# EAGLE board C335_project (EAGLE 6.1)
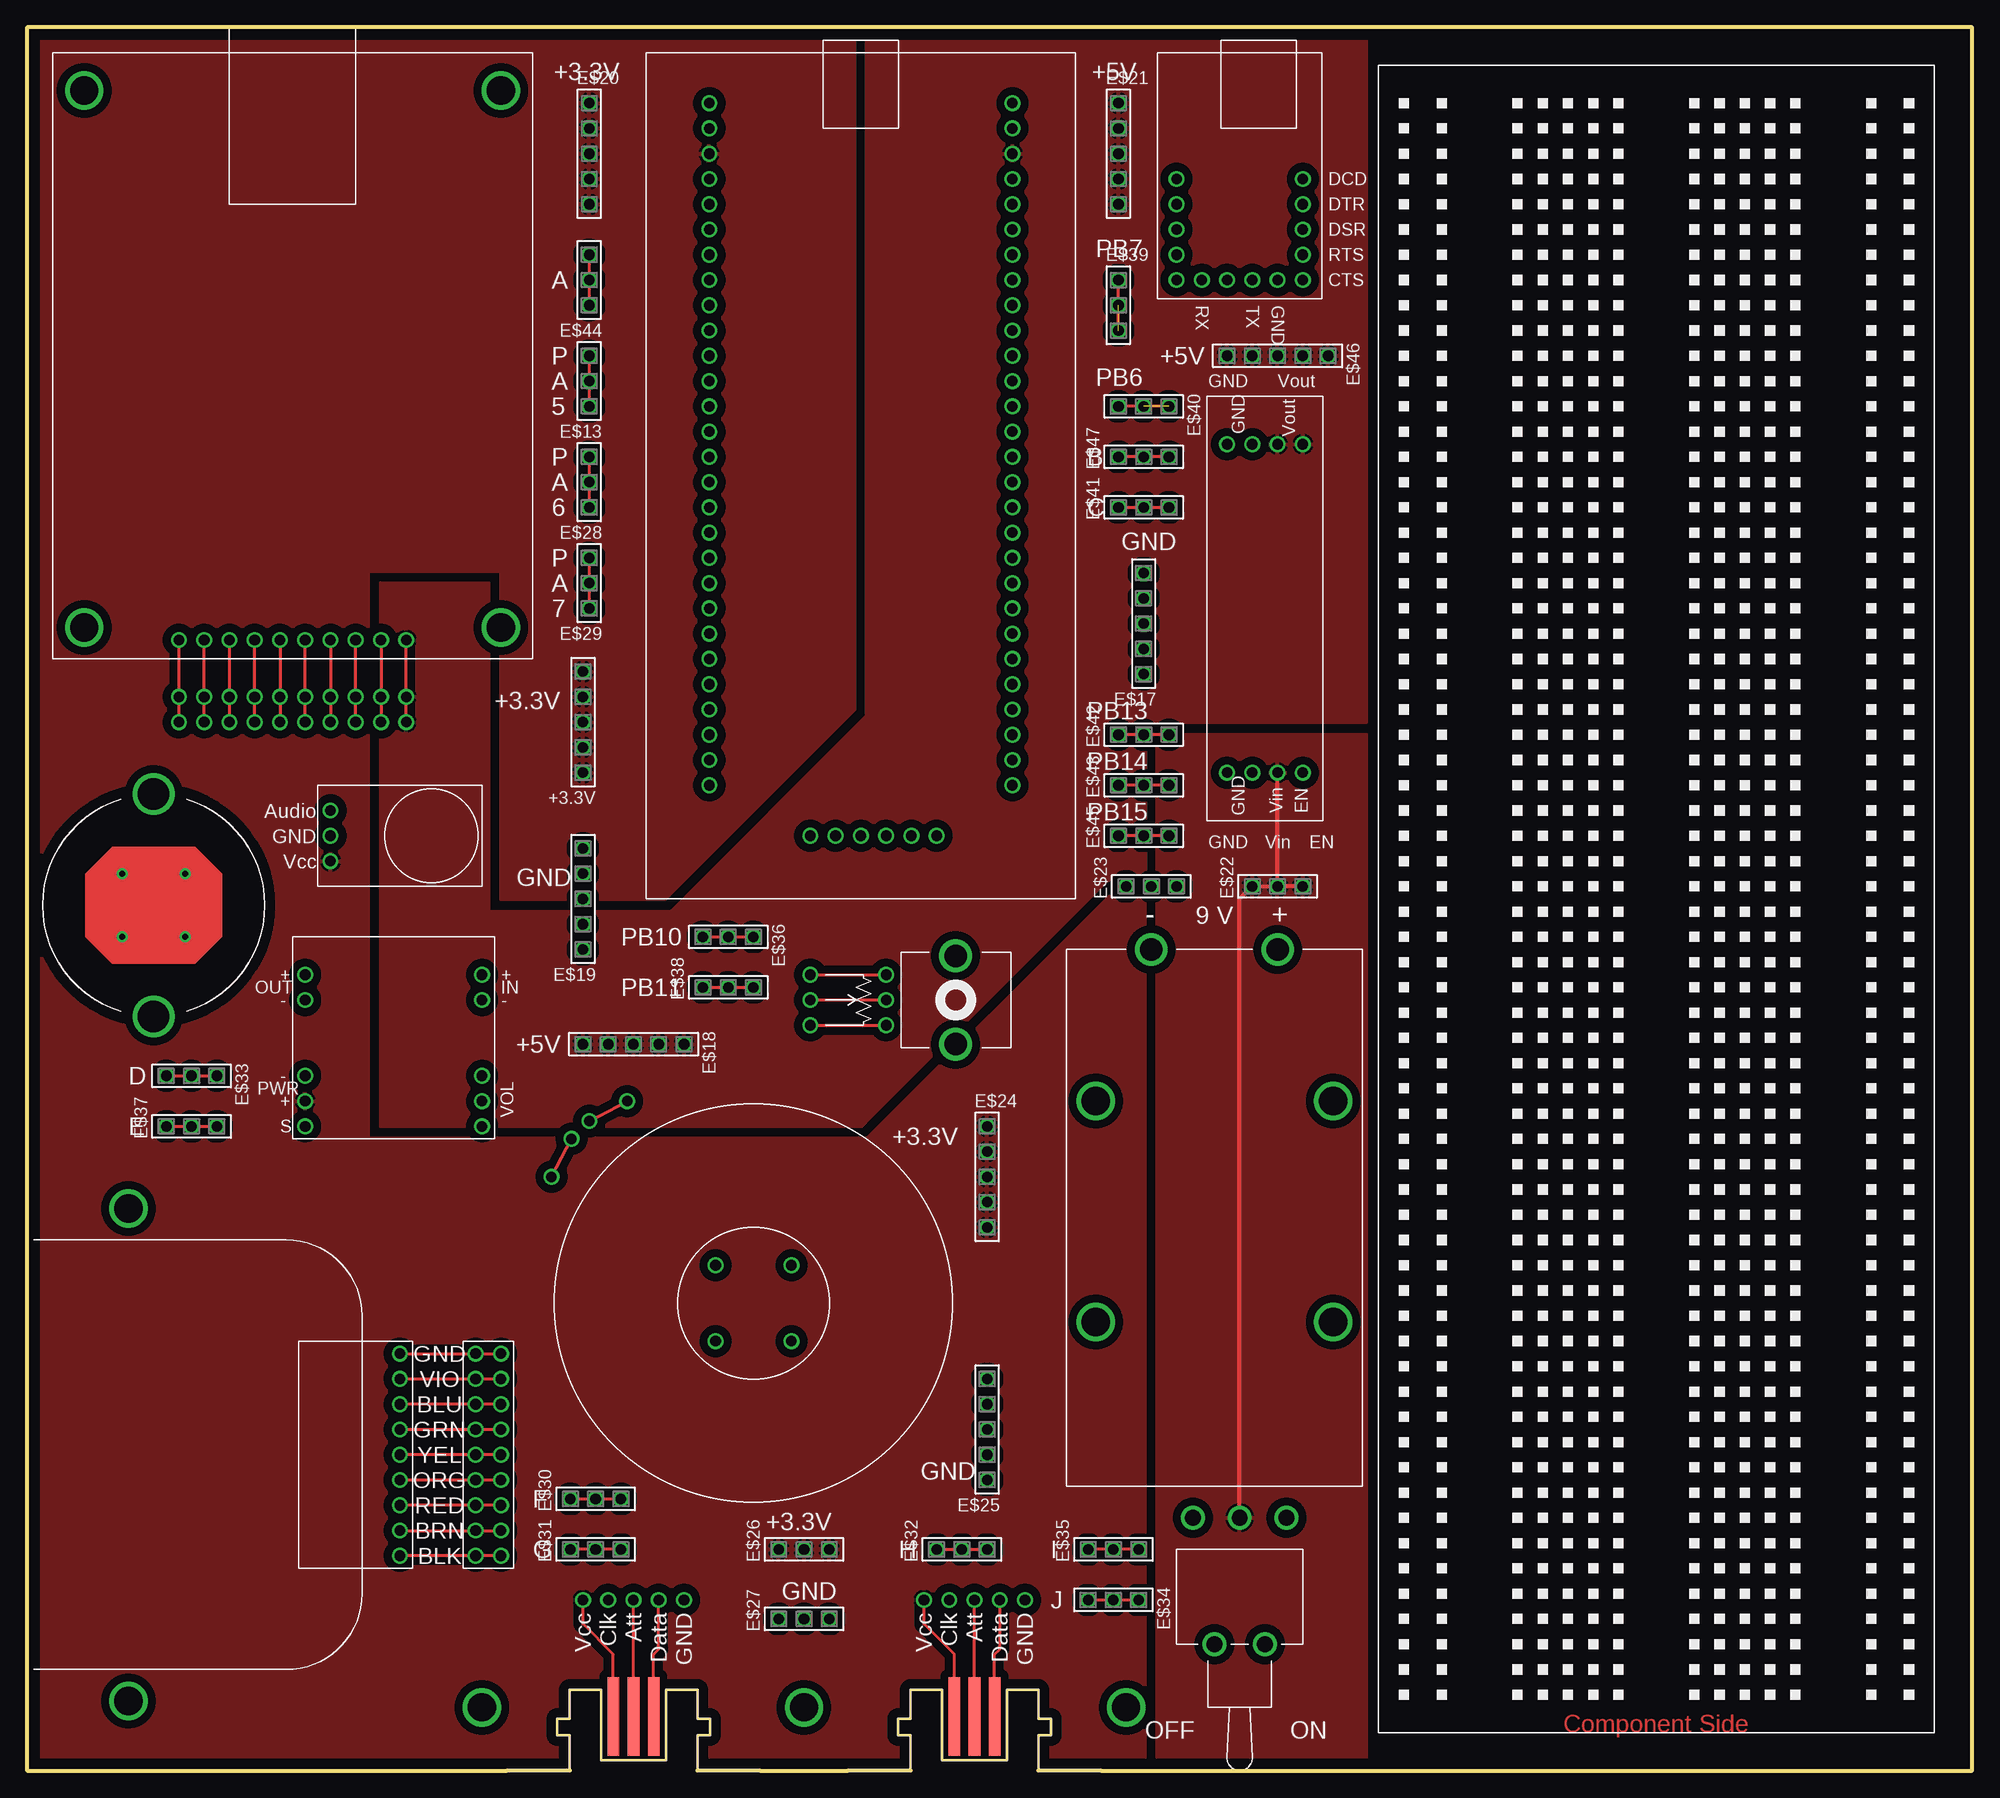
[diagram p0: board, top side]
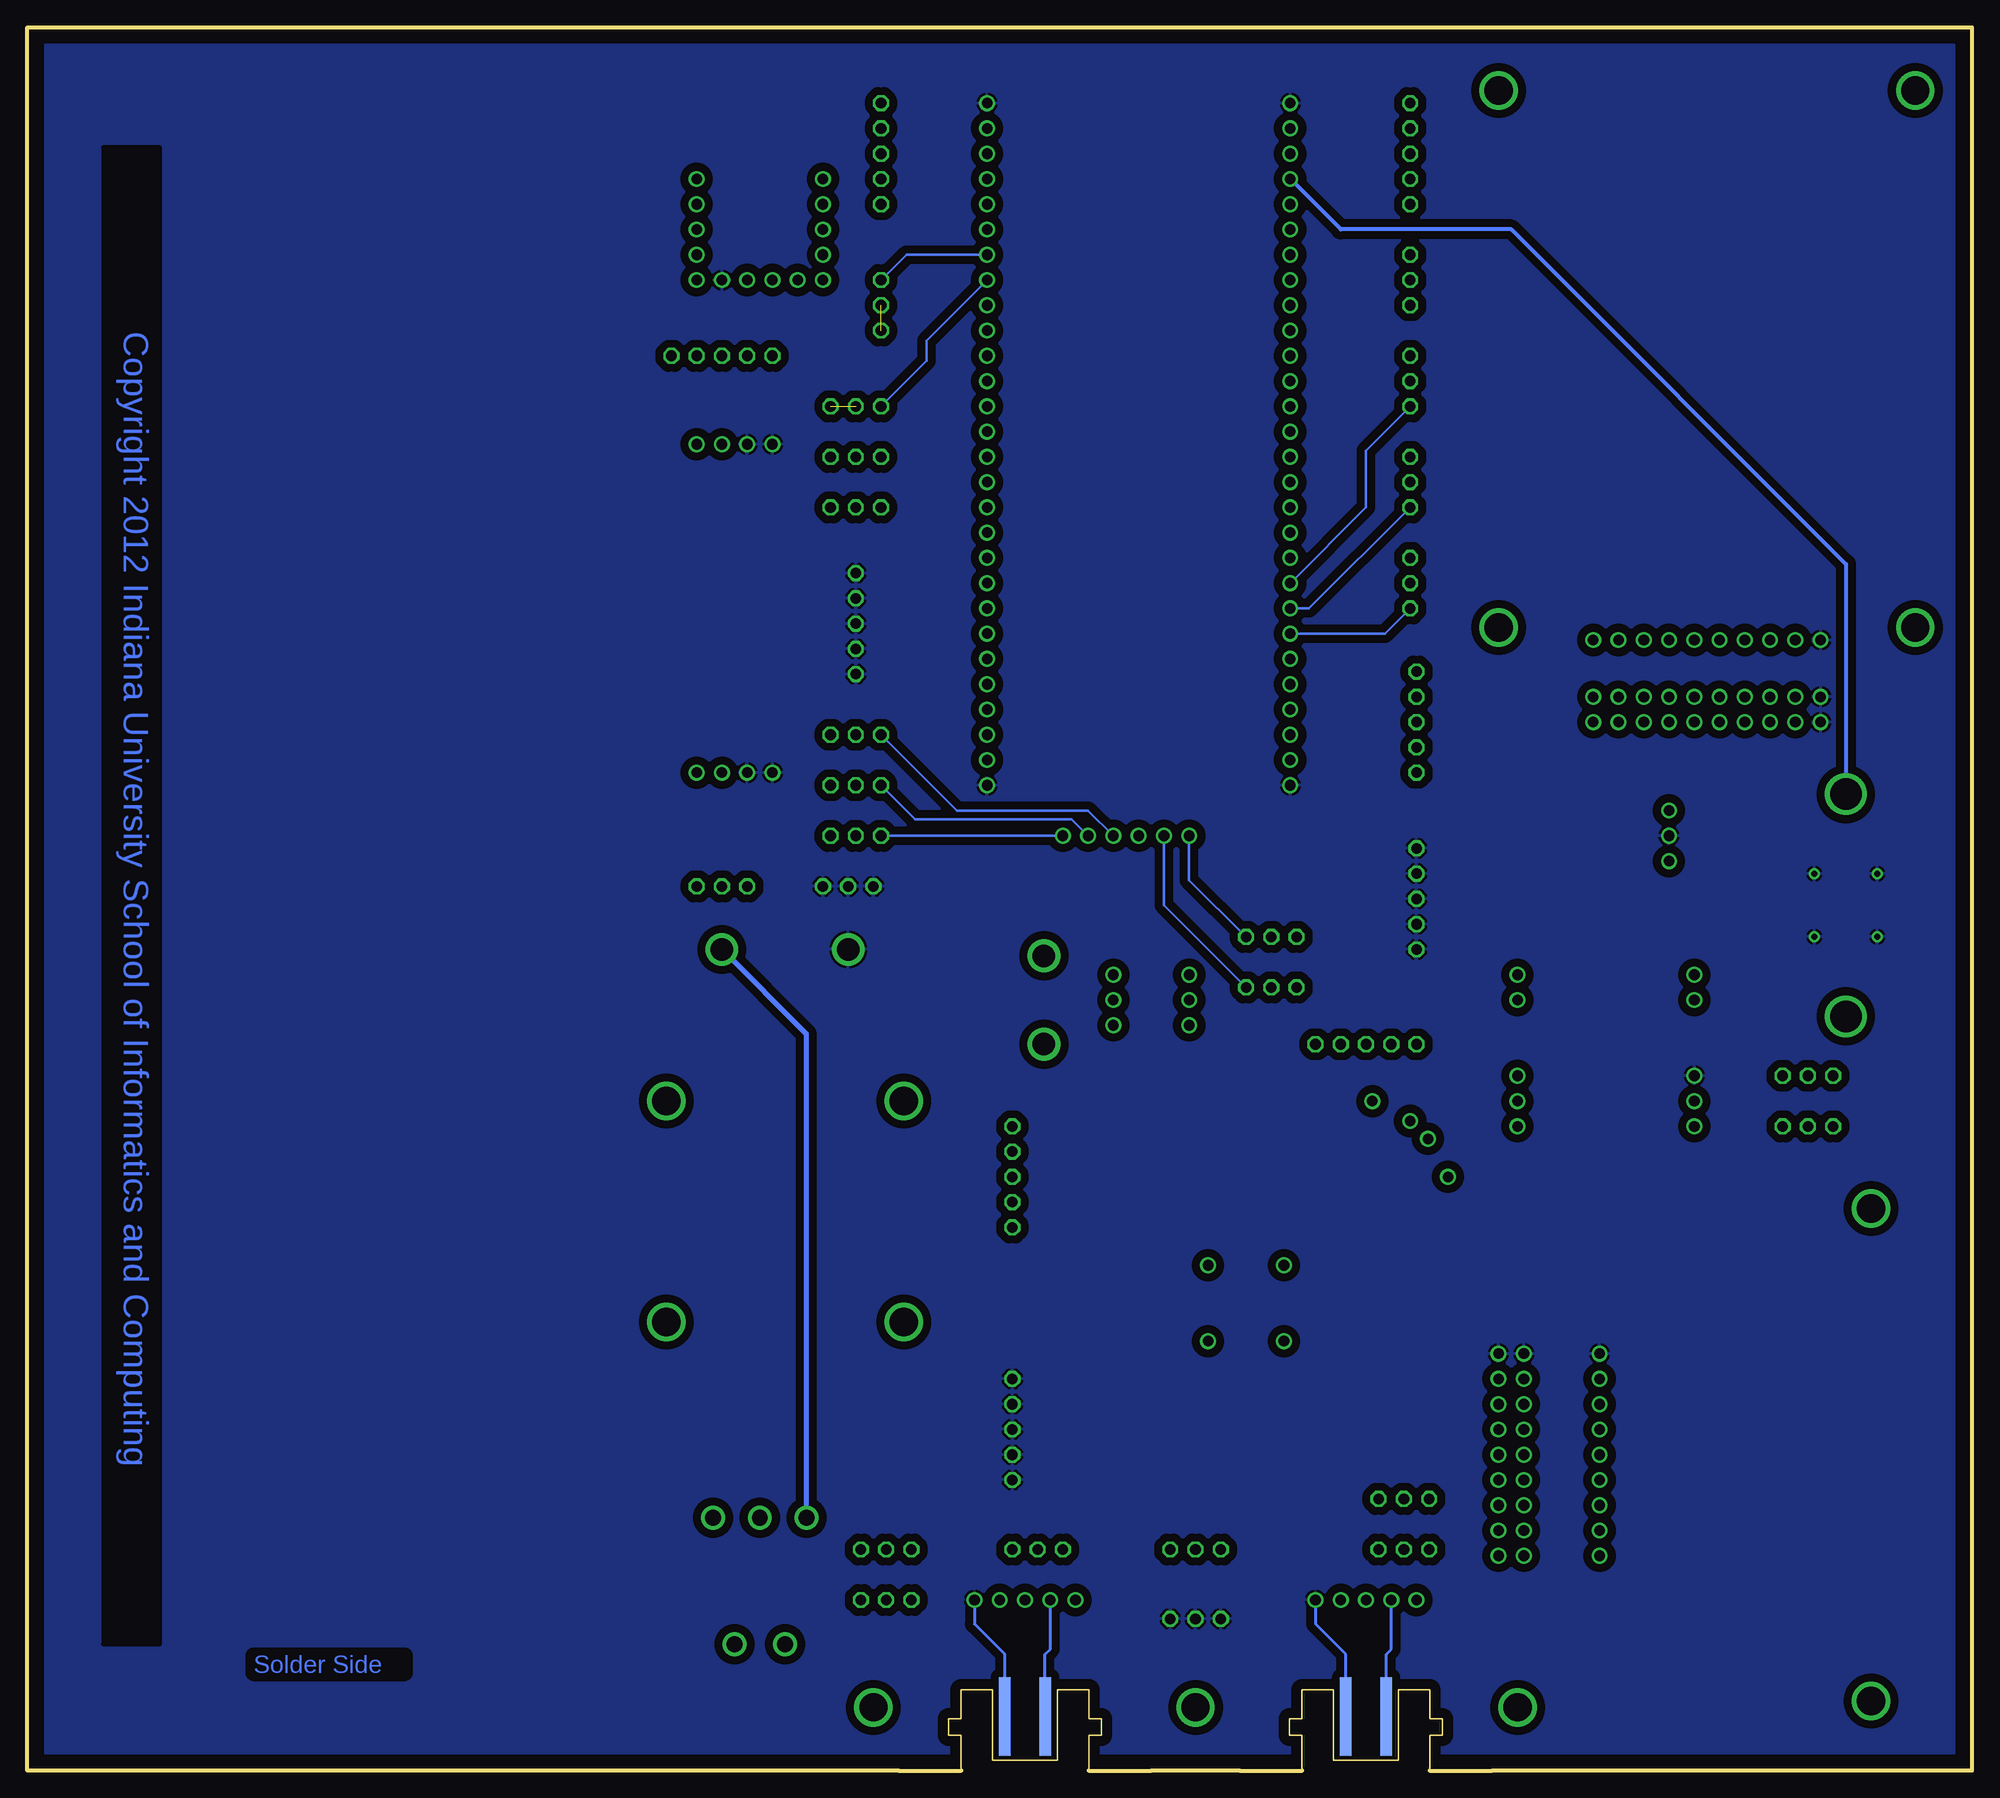
[diagram p1: board, bottom side, seen from below]

Size 195.58 x 175.26 mm. Coordinates in mm from the lower left corner, seen from the top.
Outline: 48.26,0 0,0 0,175.26 195.58,175.26 195.58,0 107.95,0
Outline: 73.66,0 82.55,0
Copper layers (1*16): Top 0.035mm / dielectric 1.5mm / Bottom 0.035mm
Design rules: minimum track width 10mil, minimum drill 20mil, track to track 8mil, track to pad 8mil, pad to pad 8mil, via to via 8mil, smd to smd 8mil, copper to edge 40mil, drill to drill 8mil, minimum pad ring 10mil, minimum via ring 8mil, stop-mask expansion 4mil, vias tented up to drill 0mil, thermal gap 10mil

## Footprints (pad centres in the part's own frame; a part is rotated, then mirrored left to right if it is on the bottom)
SSW-105-02-S-S = drill 1.067 pad 1.5 octagon: 1 -5.08,0; 2 -2.54,0; 3 0,0; 4 2.54,0; 5 5.08,0
TFT_LCD = drill 2.845: 1 -20.955,55.88; 2 20.955,55.88; 3 -20.955,1.905; 4 20.955,1.905 | drill 1.067: P$1 -11.43,0.635; P$2 -8.89,0.635; P$3 -6.35,0.635; P$4 -3.81,0.635; P$5 -1.27,0.635; P$6 1.27,0.635; P$7 3.81,0.635; P$8 6.35,0.635; P$9 8.89,0.635; P$10 11.43,0.635; P$11 -11.43,-7.62; P$12 -8.89,-7.62; P$13 -6.35,-7.62; P$14 -3.81,-7.62; P$15 -1.27,-7.62; P$16 1.27,-7.62; P$17 3.81,-7.62; P$18 6.35,-7.62; P$19 8.89,-7.62; P$20 11.43,-7.62; P$21 -11.43,-5.08; P$22 -8.89,-5.08; P$23 -6.35,-5.08; P$24 -3.81,-5.08; P$25 -1.27,-5.08; P$26 1.27,-5.08; P$27 3.81,-5.08; P$28 6.35,-5.08; P$29 8.89,-5.08; P$30 11.43,-5.08
USB_SER = drill 1.067: 1 -6.35,0; 2 -3.81,0; 3 -1.27,0; 4 1.27,0; 5 3.81,0; 6 6.35,0; 7 -6.35,2.54; 8 -6.35,5.08; 9 -6.35,7.62; 10 -6.35,10.16; 11 6.35,2.54; 12 6.35,5.08; 13 6.35,7.62; 14 6.35,10.16
STM32 = drill 1.067: P$1 -15.24,5.08; P$2 -15.24,7.62; P$3 -15.24,10.16; P$4 -15.24,12.7; P$5 -15.24,15.24; P$6 -15.24,17.78; P$7 -15.24,20.32; P$8 -15.24,22.86; P$9 -15.24,25.4; P$10 -15.24,27.94; P$11 -15.24,30.48; P$12 -15.24,33.02; P$13 -15.24,35.56; P$14 -15.24,38.1; P$15 -15.24,40.64; P$16 -15.24,43.18; P$17 -15.24,45.72; P$18 -15.24,48.26; P$19 -15.24,50.8; P$20 -15.24,53.34; P$21 -15.24,55.88; P$22 -15.24,58.42; P$23 -15.24,60.96; P$24 -15.24,63.5; P$25 -15.24,66.04; P$26 -15.24,68.58; P$27 -15.24,71.12; P$28 -15.24,73.66; P$57 -5.08,0; P$58 -2.54,0; P$59 0,0; P$60 2.54,0; P$61 5.08,0; P$62 7.62,0; P$63 15.24,5.08; P$64 15.24,7.62; P$65 15.24,10.16; P$66 15.24,12.7; P$67 15.24,15.24; P$68 15.24,17.78; P$69 15.24,20.32; P$70 15.24,22.86; P$71 15.24,25.4; P$72 15.24,27.94; P$73 15.24,30.48; P$74 15.24,33.02; P$75 15.24,35.56; P$76 15.24,38.1; P$77 15.24,40.64; P$78 15.24,43.18; P$79 15.24,45.72; P$80 15.24,48.26; P$81 15.24,50.8; P$82 15.24,53.34; P$83 15.24,55.88; P$84 15.24,58.42; P$85 15.24,60.96; P$86 15.24,63.5; P$87 15.24,66.04; P$88 15.24,68.58; P$89 15.24,71.12; P$90 15.24,73.66
MIC = drill 1.067: 1 0,0; 2 -2.54,0; 3 2.54,0
NUNCHUK_CONN = drill 1.067: 1 17.145,5.08; 2 17.145,2.54; 3 17.145,-2.54; 15 17.145,0; P$1 17.145,-5.08 | smd 7.925 x 1.168: P$2 5.436,-2.032; P$3 5.436,0; P$4 5.436,2.032 | smd 7.925 x 1.168 bottom: P$5 5.436,2.032; P$7 5.436,-2.032
SALEAE_HDR = drill 1.067: 1 0,-1.27; 2 -2.54,-1.27; 3 -5.08,-1.27; 4 -7.62,-1.27; 5 -10.16,-1.27; 6 2.54,-1.27; 7 5.08,-1.27; 8 7.62,-1.27; 9 10.16,-1.27; 10 0,8.89; 11 -2.54,8.89; 12 -5.08,8.89; 13 -7.62,8.89; 14 -10.16,8.89; 15 2.54,8.89; 16 5.08,8.89; 17 7.62,8.89; 18 10.16,8.89; 21 0,6.35; 22 -2.54,6.35; 23 -5.08,6.35; 24 -7.62,6.35; 25 -10.16,6.35; 26 2.54,6.35; 27 5.08,6.35; 28 7.62,6.35; 29 10.16,6.35 | drill 2.845: 19 -24.765,-28.575; 20 24.765,-28.575
AUDIO_AMP = drill 1.067: 1 1.27,1.27; 2 1.27,3.81; 3 1.27,6.35; 4 1.27,13.97; 5 1.27,16.51; 6 19.05,1.27; 7 19.05,3.81; 8 19.05,6.35; 9 19.05,13.97; 10 19.05,16.51
SPEAKER = drill 1.067: 1 -16.51,18.313; 2 -18.313,16.51; 3 -20.32,12.7; 4 -12.7,20.32; P$1 -3.81,3.81; P$2 -3.81,-3.81; P$3 3.81,-3.81; P$4 3.81,3.81
PWR_REG = drill 1.067: P$1 -16.51,3.81; P$2 -16.51,1.27; P$3 -16.51,-1.27; P$4 -16.51,-3.81; P$5 16.51,3.81; P$6 16.51,1.27; P$7 16.51,-1.27; P$8 16.51,-3.81
BATT_9V = drill 2.261: 1 0,6.35; 2 0,-6.35 | drill 2.845: 3 15.24,11.938; 4 15.24,-11.938; 5 37.465,11.938; 6 37.465,-11.938
SSW-103-02-S-S = drill 1.067 pad 1.5 octagon: 1 -2.54,0; 2 0,0; 3 2.54,0
POT = drill 1.067: 1 0,2.54; 2 0,0; 3 0,-2.54; 6 -7.62,2.54; 7 -7.62,0; 8 -7.62,-2.54 | drill 2.261: 4 6.985,4.445; 5 6.985,-4.445
SW_TOG_HOR_PC = drill 1.6: 1 -2.54,0; 2 2.54,0; 3 0,12.7; 4 -4.699,12.7; 5 4.699,12.7
BATT_CR20 = drill 3.175: 1 -11.176,0; 2 11.176,0 | drill 0.61: 3 -3.175,3.175; 4 3.175,3.175; 5 -3.175,-3.175; 6 3.175,-3.175

## Placement (x,y rotation side)
+3.3V  [SSW-105-02-S-S]  55.88,105.41 90 top
E$1  [TFT_LCD]  26.67,113.03 0 top
E$2  [USB_SER]  121.92,149.86 0 top
E$3  [STM32]  83.82,93.98 0 top
E$4  [PROTOBRD]  163.83,7.62 0 top
E$5  [MIC]  30.48,93.98 270 top
E$6  [NUNCHUK_CONN]  60.96,0 90 top
E$7  [NUNCHUK_CONN]  95.25,0 90 top
E$8  [SALEAE_HDR]  38.74,31.75 270 top
E$9  [AUDIO_AMP]  26.67,63.5 0 top
E$10  [SPEAKER]  73.03,46.99 0 top
E$11  [PWR_REG]  124.46,116.84 90 top
E$12  [BATT_9V]  119.38,82.55 270 top
E$13  [SSW-103-02-S-S]  56.52,139.7 90 top
E$14  [POT]  86.36,77.47 0 top
E$15  [SW_TOG_HOR_PC]  121.92,12.7 0 top
E$16  [BATT_CR20]  12.7,87 90 top
E$17  [SSW-105-02-S-S]  112.27,115.32 90 top
E$18  [SSW-105-02-S-S]  60.96,73.03 180 top
E$19  [SSW-105-02-S-S]  55.88,87.63 90 top
E$20  [SSW-105-02-S-S]  56.52,162.56 270 top
E$21  [SSW-105-02-S-S]  109.73,162.56 270 top
E$22  [SSW-103-02-S-S]  125.73,88.9 0 top
E$23  [SSW-103-02-S-S]  113.03,88.9 0 top
E$24  [SSW-105-02-S-S]  96.52,59.69 270 top
E$25  [SSW-105-02-S-S]  96.52,34.29 90 top
E$26  [SSW-103-02-S-S]  78.1,22.23 0 top
E$27  [SSW-103-02-S-S]  78.1,15.24 0 top
E$28  [SSW-103-02-S-S]  56.52,129.54 90 top
E$29  [SSW-103-02-S-S]  56.52,119.38 90 top
E$30  [SSW-103-02-S-S]  57.15,27.3 0 top
E$31  [SSW-103-02-S-S]  57.15,22.23 0 top
E$32  [SSW-103-02-S-S]  93.98,22.23 0 top
E$33  [SSW-103-02-S-S]  16.51,69.85 180 top
E$34  [SSW-103-02-S-S]  109.22,17.15 180 top
E$35  [SSW-103-02-S-S]  109.22,22.23 0 top
E$36  [SSW-103-02-S-S]  70.49,83.82 180 top
E$37  [SSW-103-02-S-S]  16.51,64.77 0 top
E$38  [SSW-103-02-S-S]  70.49,78.74 0 top
E$39  [SSW-103-02-S-S]  109.73,147.32 270 top
E$40  [SSW-103-02-S-S]  112.27,137.16 180 top
E$41  [SSW-103-02-S-S]  112.27,127 0 top
E$42  [SSW-103-02-S-S]  112.27,104.14 0 top
E$43  [SSW-103-02-S-S]  112.27,99.06 0 top
E$44  [SSW-103-02-S-S]  56.52,149.86 90 top
E$45  [SSW-103-02-S-S]  112.27,93.98 0 top
E$46  [SSW-105-02-S-S]  125.73,142.24 180 top
E$47  [SSW-103-02-S-S]  112.27,132.08 0 top

## Library data of the parts
+3.3V E$13 E$17-E$47 = con-samtec
E$1-E$12 E$14-E$16 = C335

## Nets
3.3V: +3.3V.1 +3.3V.2 +3.3V.3 +3.3V.4 +3.3V.5 E$3.P$26 E$5.3 E$6.1 E$7.1 E$9.2 E$20.1 E$20.2 E$20.3 E$20.4 E$20.5 E$24.1 E$24.2 E$24.3 E$24.4 E$24.5 E$26.1 E$26.2 E$26.3
5V: E$1.P$10 E$1.P$20 E$1.P$30 E$3.P$88 E$11.P$7 E$11.P$8 E$18.1 E$18.2 E$18.3 E$18.4 E$18.5 E$21.1 E$21.2 E$21.3 E$21.4 E$21.5 E$46.1 E$46.2 E$46.3 E$46.4 E$46.5
+9V: E$11.P$3 E$15.3 E$22.1 E$22.2 E$22.3
GND: E$1.P$1 E$1.P$11 E$1.P$21 E$2.5 E$3.P$1 E$3.P$28 E$3.P$63 E$3.P$90 E$5.1 E$6.P$1 E$7.P$1 E$8.5 E$8.14 E$8.25 E$9.3 E$11.P$1 E$11.P$2 E$11.P$5 E$11.P$6 E$12.2 E$16.3 E$16.4 E$16.5 E$16.6 E$17.1 E$17.2 E$17.3 E$17.4 E$17.5 E$19.1 E$19.2 E$19.3 E$19.4 E$19.5 E$23.1 E$23.2 E$23.3 E$25.1 E$25.2 E$25.3 E$25.4 E$25.5 E$27.1 E$27.2 E$27.3
S$2: E$12.1 E$15.4
S$3: E$47.1 E$47.3
S$6: E$35.1 E$35.3
S$7: E$34.1 E$34.3
S$10: E$32.1 E$32.3
S$11: E$31.1 E$31.3
S$12: E$30.1 E$30.3
S$13: E$33.1 E$33.3
S$14: E$3.P$9 E$13.1 E$13.3
S$16: E$3.P$7 E$29.1 E$29.3
S$17: E$37.1 E$37.3
S$18: E$3.P$57 E$36.1 E$36.3
S$19: E$3.P$58 E$38.1 E$38.3
S$20: E$3.P$60 E$42.1 E$42.3
S$21: E$41.1 E$41.3
S$22: E$3.P$84 E$39.1 E$39.2 E$39.3
S$23: E$3.P$83 E$40.1 E$40.2 E$40.3
S$24: E$3.P$8 E$28.1 E$28.3
S$25: E$3.P$61 E$43.1 E$43.3
S$26: E$44.1 E$44.3
S$27: E$3.P$62 E$45.1 E$45.3
VBAT: E$3.P$25

## Tracks (layer width: path | path; a pad name or v marks a point on that pad's centre or on a via)
3.3V
  pour Top (isolate 0.813): 83.19,173.99 1.27,173.99 1.27,1.27 112.39,1.27 112.39,88.27 109.22,88.27 84.46,63.5 34.29,63.5 34.29,120.65 47.63,120.65 47.63,87.63 64.13,87.63 83.19,106.68
5V
  pour Top (isolate 0.813): 35.56,64.77 35.56,119.38 46.35,119.38 46.35,86.36 64.77,86.36 84.46,106.04 84.46,173.99 134.62,173.99 134.62,105.41 112.39,105.41 112.39,89.53 108.59,89.53 83.82,64.77
+9V
  Top 0.406: E$15.3 121.92,87.63 E$22.1 E$22.2 | E$22.3 E$22.2 | E$22.2 E$11.P$3
  pour Top (isolate 0.813): 113.66,104.14 134.62,104.14 134.62,1.27 113.66,1.27
GND
  pour Bottom (isolate 0.813): 1.78,1.78 1.78,173.48 193.8,173.48 193.8,1.78
S$1
  cutout Bottom: 182.25,12.7 182.25,163.19 187.96,163.19 187.96,12.7
S$2
  Bottom 0.508: E$15.4 117.22,74.04 E$12.1
S$3
  Top 0.305: E$47.3 E$47.1
S$4
  Top 0.254: 0,0 0,175.26 195.58,175.26 195.58,0 101.68,0 101.68,3.56 102.95,3.56 102.95,5.21 101.68,5.21 101.68,8.13 98.5,8.13 98.5,1.02 92,1.02 92,8.13 88.82,8.13 88.82,5.21 87.55,5.21 87.55,3.56 88.82,3.56 88.82,0 67.39,0 67.39,3.56 68.66,3.56 68.66,5.21 67.39,5.21 67.39,8.13 64.21,8.13 64.21,1.02 57.71,1.02 57.71,8.13 54.53,8.13 54.53,5.21 53.26,5.21 53.26,3.56 54.53,3.56 54.53,0 0,0
S$5  (via drill 2.84)
  other vias: 45.72,6.35
S$6
  Top 0.305: E$35.3 E$35.1
S$7
  Top 0.305: E$34.3 E$34.1
S$8  (via drill 2.84)
  other vias: 78.1,6.35
S$9  (via drill 2.84)
  other vias: 110.49,6.35
S$10
  Top 0.305: E$32.1 E$32.3
S$11
  Top 0.305: E$31.3 E$31.1
S$12
  Top 0.305: E$30.1 E$30.3
S$13
  Top 0.305: E$33.3 E$33.1
S$14
  Top 0.305: E$13.3 E$13.1
  Bottom 0.254: E$3.P$9 60.96,127 60.96,132.72 E$13.1
S$15
  cutout Top: 0.64,87 arc90 12.7,74.93 arc90 24.77,87 arc90 12.7,99.06 arc90
S$16
  Top 0.305: E$29.3 E$29.1
  Bottom 0.254: E$3.P$7 59.05,114.3 E$29.1
S$17
  Top 0.305: E$37.1 E$37.3
S$18
  Top 0.305: E$36.3 E$36.1
  Bottom 0.254: E$36.1 78.74,89.53 E$3.P$57
S$19
  Top 0.305: E$38.1 E$38.3
  Bottom 0.254: E$3.P$58 81.28,87 E$38.3
S$20
  Top 0.305: E$42.3 E$42.1
  Bottom 0.254: E$42.1 102.11,96.52 88.9,96.52 E$3.P$60
S$21
  Top 0.305: E$41.1 E$41.3
S$22  (1 unrouted)
  Top 0.305: E$39.3 E$39.1
  Bottom 0.254: E$39.1 107.19,152.4 E$3.P$84
S$23  (1 unrouted)
  Top 0.305: E$40.1 E$40.3
  Bottom 0.254: E$3.P$83 105.16,143.76 105.16,141.73 E$40.3
S$24
  Top 0.305: E$28.3 E$28.1
  Bottom 0.254: E$28.1 66.68,116.84 E$3.P$8
S$25
  Top 0.305: E$43.3 E$43.1
  Bottom 0.254: E$43.1 106.3,95.63 90.55,95.63 E$3.P$61
S$26
  Top 0.305: E$44.3 E$44.1
S$27
  Top 0.305: E$45.3 E$45.1
  Bottom 0.254: E$45.1 E$3.P$62
VBAT
  Bottom 0.406: E$3.P$25 63.5,154.94 46.35,154.94 12.7,121.28 12.7,98.17

## Text on the board
Top: Component Side
Bottom: Copyright 2012 Indiana University School of Informatics and Computing | Solder Side
Dimension: Prewired Pins | on the C335 Board | Power Pins | GROUND | +3.3 V | +5 V | Peripheral Pins | I2C | SPI
tPlace: +3.3V | +5V | DCD | DTR | DSR | PB7 | RTS | A | CTS | RX | TX | GND | P | +5V | A | PB6 | GND | Vout | 5 | P | B | A | 6 | C | GND | P | A | 7 | +3.3V | PB13 | PB14 | PB15 | GND | Vin | EN | GND | PB10 | PB11 | +5V | D | E | +3.3V | GND | F | +3.3V | G | H | I | GND | J | OFF | ON
tStop: Top Solder Mask
bStop: Bottom Solder Mask